# EAGLE board sensor_v5 (EAGLE 7.6.0)
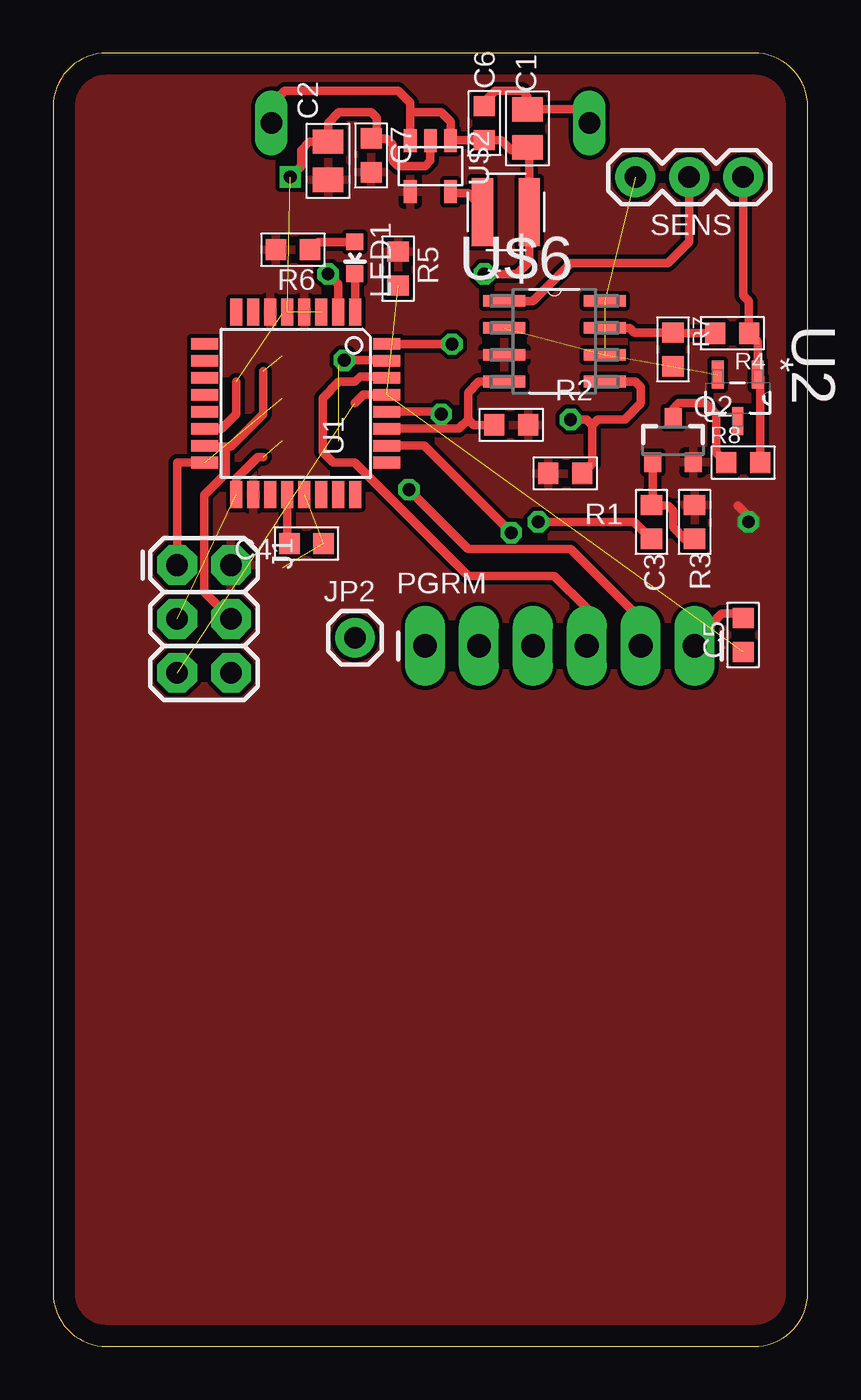
[diagram p0: board, top side]
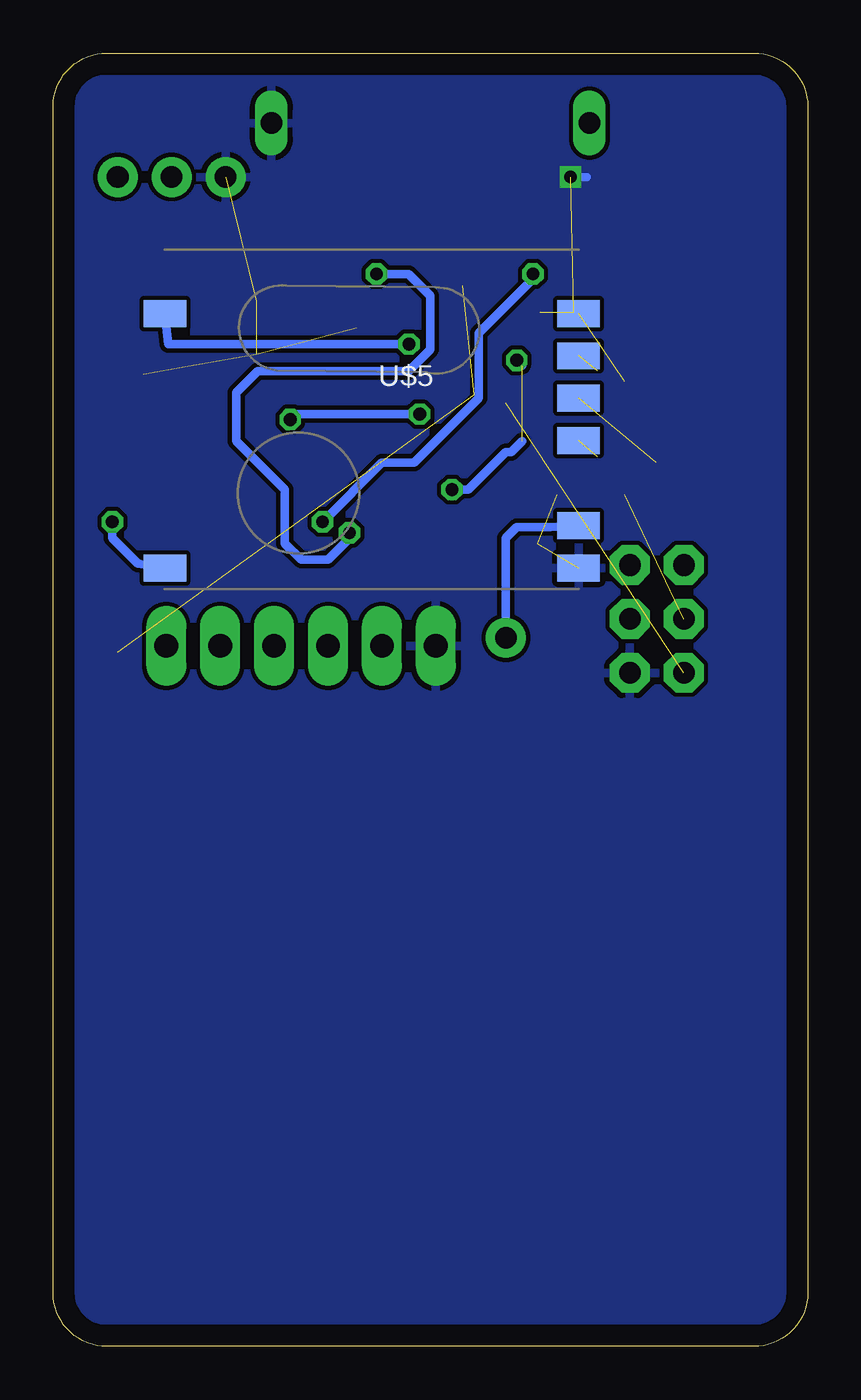
[diagram p1: board, bottom side, seen from below]

Size 35.56 x 60.96 mm. Coordinates in mm from the lower left corner, seen from the top.
Outline: 0,58.42 0,2.54 arc90 2.54,0 33.02,0 arc90 35.56,2.54 35.56,58.42 arc90 33.02,60.96 2.54,60.96 arc90 0,58.42
Copper layers (1*16): Top 0.035mm / dielectric 1.5mm / Bottom 0.035mm
Design rules "default": minimum track width 10mil, minimum drill 24mil, track to track 8mil, track to pad 8mil, pad to pad 8mil, via to via 8mil, smd to smd 8mil, copper to edge 40mil, drill to drill 8mil, minimum pad ring 10mil, minimum via ring 8mil, stop-mask expansion 4mil, vias tented up to drill 0mil, thermal gap 10mil

## Footprints (pad centres in the part's own frame; a part is rotated, then mirrored left to right if it is on the bottom)
C0805-N = smd 1.15 x 1.45: 1 -0.9,0; 2 0.9,0
C0603-N = smd 0.95 x 1: 1 -0.8,0; 2 0.8,0
2X3 = drill 1.016 pad 1.88 octagon: 1 0,0; 2 0,2.54; 3 2.54,0; 4 2.54,2.54; 5 5.08,0; 6 5.08,2.54
1X01 = drill 1.016 pad 1.88: 1 0,0
LED-0603 = smd 0.8 x 0.8: A 0,-0.75; C 0,0.75
1X06_LONGPADS = drill 1.118 pad 1.88 long: 1 0,0; 2 2.54,0; 3 5.08,0; 4 7.62,0; 5 10.16,0; 6 12.7,0
SOT23-3 = smd 0.8 x 0.9: 1 -0.95,-1; 2 0.95,-1; 3 0,1.1
R0603-N = smd 0.95 x 1: 1 -0.8,0; 2 0.8,0
1X03 = drill 1.016 pad 1.88: 1 0,0; 2 2.54,0; 3 5.08,0
TQFP32-08 = smd 1.27 x 0.559: 1 -4.293,2.8; 2 -4.293,2; 3 -4.293,1.2; 4 -4.293,0.4; 5 -4.293,-0.4; 6 -4.293,-1.2; 7 -4.293,-2; 8 -4.293,-2.8; 17 4.293,-2.8; 18 4.293,-2; 19 4.293,-1.2; 20 4.293,-0.4; 21 4.293,0.4; 22 4.293,1.2; 23 4.293,2; 24 4.293,2.8 | smd 0.559 x 1.27: 9 -2.8,-4.293; 10 -2,-4.293; 11 -1.2,-4.293; 12 -0.4,-4.293; 13 0.4,-4.293; 14 1.2,-4.293; 15 2,-4.293; 16 2.8,-4.293; 25 2.8,4.293; 26 2,4.293; 27 1.2,4.293; 28 0.4,4.293; 29 -0.4,4.293; 30 -1.2,4.293; 31 -2,4.293; 32 -2.8,4.293
SOT95P237X112-3N = smd 1.321 x 0.559: 1 -1.092,0.94; 2 -1.092,-0.94 | smd 1.321 x 0.508: 3 1.092,0
KEYSTONEAAHOLDER_2CELL = drill 1.016 pad 1.524 long: P$1 -7.493,27.178; P$2 7.493,27.178
SOT23-5 = smd 0.6 x 1.1: P$1 -0.95,-1.2; P$2 0,-1.2; P$3 0.95,-1.2; P$4 0.95,1.2; P$5 -0.95,1.2
WURTH_10UH_650MA = smd 3.2 x 1: P$1 0,-1.1; P$2 0,1.1
RFM69W-MINPADS = smd 2 x 1.27: ANA 8,-5; DIO0 -11.5,5; GND 8,-7; MISO 8,1; MOSI 8,3; NSS 8,5; SCK 8,-1; VDD -11.5,-7
SOIC127P600X175-8N = smd 1.981 x 0.559: 1 -2.362,1.905; 2 -2.362,0.635; 3 -2.362,-0.635; 4 -2.362,-1.905; 5 2.362,-1.905; 6 2.362,-0.635; 7 2.362,0.635; 8 2.362,1.905

## Placement (x,y rotation side)
C1  10uF  [C0805-N]  22.35,57.4 90 top
C2  10uF  [C0805-N]  12.95,55.88 90 top
C3  0.1uF  [C0603-N]  28.19,38.86 270 top
C4  0.1uF  [C0603-N]  11.94,37.85 180 top
C5  0.1uF  [C0603-N]  32.51,33.53 90 top
C6  0.1uF  [C0603-N]  20.32,57.66 90 top
C7  0.1uF  [C0603-N]  14.99,56.13 90 top
J1  AVR_SPI_PRG_6PTH  [2X3]  5.84,36.83 270 top
JP2  M01PTH  [1X01]  14.22,33.4 0 top
LED1  [LED-0603]  14.22,51.31 180 top
PGRM  [1X06_LONGPADS]  17.53,33.02 0 top
Q2  MOSFET-P  [SOT23-3]  29.21,42.67 0 top
R1  10k  [R0603-N]  24.13,41.15 180 top
R2  10k  [R0603-N]  21.59,43.43 0 top
R3  1M  [R0603-N]  30.23,38.86 90 top
R4  10k  [R0603-N]  32,47.75 180 top
R5  10k  [R0603-N]  16.26,50.8 90 top
R6  480  [R0603-N]  11.3,51.69 0 top
R7  THERM  [R0603-N]  29.21,46.99 270 top
R8  330  [R0603-N]  32.51,41.66 0 top
SENS  [1X03]  27.43,55.12 0 top
U1  ATMEGA328P  [TQFP32-08]  11.43,44.45 270 top
U2  LM4040A20IDBZT  [SOT95P237X112-3N]  32.26,44.7 270 top
U$1  KEYSTONEAAHOLDER_2CELL  [KEYSTONEAAHOLDER_2CELL]  17.78,30.48 0 top
U$2  TPS61097-33  [SOT23-5]  17.78,55.63 180 top
U$4  4.7uH  [WURTH_10UH_650MA]  21.34,53.47 270 top
U$5  RFM69  [RFM69W-MINPADS]  18.8,43.69 0 bottom
U$6  MCP3426A0-E/SN  [SOIC127P600X175-8N]  23.62,47.37 0 top

## Library data of the parts
C1-C7 R1-R8 = passives-7351
J1 JP2 PGRM SENS = SparkFun-Connectors
LED1 = SparkFun-LED
Q2 = SparkFun-DiscreteSemi; PROD_ID: TRANS-11153
U1 = SparkFun-DigitalIC; PROD_ID: IC-09069
U2 = Texas Instruments_By_element14_Batch_1; MPN: LM4040A20IDBZT; OC_FARNELL: 1702826; OC_NEWARK: 53K9321; PACKAGE: 3-SOT-23; SUPPLIER: TEXAS INSTRUMENTS
U$1 U$2 U$4 = _my-parts
U$5 = LowPowerLab
U$6 = Microchip_By_element14_Batch_1; MPN: MCP3426A0-E/SN; OC_FARNELL: 1825012; OC_NEWARK: 52R9954; PACKAGE: SOIC-8; SUPPLIER: Microchip

## Nets
G: C3.1 Q2.1 R3.1
GND: C1.2 C2.2 C4.1 C6.2 C7.2 J1.6 PGRM.1 R7.2 SENS.1 U1.3 U1.5 U1.21 U2.2 U$1.P$2 U$2.P$2 U$5.GND U$6.2 U$6.6 U$6.8
IRQ: U1.32 U$5.DIO0
MISO: J1.1 U1.16 U$5.MISO
MOSI: J1.4 U1.15 U$5.MOSI
N$1: U$2.P$5 U$4.P$1
N$4: C4.2 U1.20
N$5: LED1.C U1.1
N$7: JP2.1 U$5.ANA
N$9: LED1.A R6.2
N$10: C5.2 PGRM.6
RST: C5.1 J1.5 R5.1 U1.29
RX: PGRM.4 U1.30
S_EN: Q2.3 R8.1
SCK: J1.3 U1.17 U$5.SCK
SCL: R1.1 U1.28 U$6.5
SDA: R2.1 U1.27 U$6.4
SENS: SENS.2 U$6.1
SENS_EN: C3.2 U1.2
SS: U1.14 U$5.NSS
THERM: R4.2 R7.1 U$6.7
TX: PGRM.5 U1.31
V3.3: C2.1 C7.1 J1.2 Q2.2 R1.2 R2.2 R3.2 R5.2 R6.1 U1.4 U1.6 U1.18 U$2.P$4 U$5.VDD U$6.3
V_REF: R4.1 R8.2 SENS.3 U2.1
VBAT: C1.1 C6.1 U1.26 U$1.P$1 U$2.P$1 U$2.P$3 U$4.P$2

## Tracks (layer width: path | path; a pad name or v marks a point on that pad's centre or on a via)
G
  Top 0.406: Q2.1 28.26,39.73 C3.1 28.23,39.62 28.96,39.62 29.21,39.37 29.21,38.61 29.76,38.06 R3.1
GND  (via drill 0.6)  (9 unrouted)
  Top 0.406: U$2.P$2 17.78,55.88 17.53,55.63 16.26,55.63 16,55.88 16,56.64 15.71,56.93 C7.2 15.24,57.19 15.24,57.91 14.99,58.17 13.46,58.17 12.95,57.66 C2.2 12.08,56.78 11.68,56.39 11.68,55.63 v11.18,55.12 | C6.2 20.32,58.67 20.83,59.18 22.1,59.18 22.35,58.93 C1.2 24.63,58.3 U$1.P$2
  Bottom 0.406: v11.18,55.12 10.41,55.12
  pour Bottom: -1.02,-1.27 36.83,-1.27 36.83,62.23 -1.27,62.23 -1.27,-1.27
IRQ  (via drill 0.6)
  Top 0.406: U1.32 17.27,47.25 v18.8,47.24
  Bottom 0.406: v18.8,47.24 30.12,47.24 U$5.DIO0
MISO  (1 unrouted)
  Top 0.406: U1.16 5.85,41.65 5.84,41.66 J1.1
MOSI  (1 unrouted)
  Top 0.406: 9.91,45.97 9.91,43.94 8.38,42.42 8.13,42.42 | 8.13,42.42 7.17,42.42 U1.15 | 8.13,42.42 8.13,41.15 7.11,40.13 7.11,35.56 J1.4
N$1
  Top 0.406: U$4.P$1 20.24,53.68 19.56,54.36 18.8,54.36 U$2.P$5
N$4
  Top 0.406: U1.20 11.03,37.95 C4.2
N$5
  Top 0.406: U1.1 LED1.C
N$7
  Bottom 0.406: JP2.1 14.22,38.1 13.72,38.61 12.15,38.61 U$5.ANA
N$9
  Top 0.406: LED1.A 12.47,52.06 R6.2
N$10
  Top 0.406: PGRM.6 30.23,33.27 31.5,34.54 32.3,34.54 C5.2
RST  (3 unrouted)
  Top 0.406: U1.29 14.62,44.85 14.22,44.45
RX
  Top 0.406: PGRM.4 25.15,34.8 23.62,36.32 19.56,36.32 14.22,41.66 13.21,41.66 12.7,42.16 12.7,44.7 13.46,45.47 14.22,45.47 14.48,45.72 15.65,45.72 U1.30
S_EN
  Top 0.406: Q2.3 29.21,44.2 29.46,44.45 30.73,44.45 31.24,43.94 31.24,42.13 R8.1
SCK  (2 unrouted)
  Top 0.406: 9.91,41.91 9.65,41.91 8.64,40.89 U1.17
SCL  (via drill 0.6)
  Top 0.406: U$6.5 27.43,45.47 27.69,45.21 27.69,44.45 26.92,43.69 25.65,43.69 25.4,43.43 | 25.4,43.43 25.4,41.62 R1.1 | U1.28 18.18,44.05 v18.29,43.94 | v24.38,43.69 25.15,43.69 25.4,43.43
  Bottom 0.406: v18.29,43.94 24.13,43.94 v24.38,43.69
SDA
  Top 0.406: U$6.4 20.07,45.47 19.56,44.96 19.56,43.69 | 19.56,43.69 19.81,43.43 R2.1 | U1.27 19.12,43.25 19.56,43.69
SENS
  Top 0.406: U$6.1 22.61,49.28 24.38,51.05 28.96,51.05 29.97,52.07 SENS.2
SENS_EN  (via drill 0.6)
  Top 0.406: U1.2 13.43,50.07 v12.95,50.55 | v22.86,38.86 27.39,38.86 C3.2
  Bottom 0.406: v12.95,50.55 12.95,50.29 15.49,47.75 15.49,44.7 18.54,41.66 20.07,41.66 v22.86,38.86
SS  (1 unrouted)
  Top 0.406: U1.14 7.94,43.25 8.64,43.94 8.64,45.47
THERM
  Top 0.406: R4.2 29.25,47.75 R7.1 27.39,47.79 27.18,48.01 U$6.7
TX  (via drill 0.6)  (1 unrouted)
  Top 0.406: PGRM.5 27.69,34.29 24.38,37.59 19.56,37.59 v16.76,40.39 | v13.72,46.48 15.69,46.48 U1.31
  Bottom 0.406: v16.76,40.39 16,40.39 14.22,42.16 13.97,42.16 13.46,42.67 | 13.46,46.23 v13.72,46.48
V3.3  (via drill 0.6)
  Top 0.406: v32.77,38.86 32.77,39.12 32.26,39.62
  Bottom 0.406: U$5.VDD 31.57,36.9 32.77,38.1 v32.77,38.86
  pour Top: -1.27,-1.27 36.83,-1.27 36.83,62.23 -1.27,62.23
V_REF
  Top 0.406: R8.2 33.31,45.68 U2.1 33.2,47.36 R4.1 32.77,47.79 32.77,49.28 32.51,49.53 SENS.3
VBAT  (via drill 0.6)
  Top 0.406: U$2.P$3 16.83,58.17 | 16.83,58.17 16.83,58.61 16.26,59.18 10.92,59.18 10.41,58.67 10.41,57.78 U$1.P$1 | 16.83,58.17 18.29,58.17 18.73,57.72 U$2.P$1 18.76,56.86 C6.1 21.12,56.86 21.59,56.39 22.24,56.39 C1.1 22.44,56.42 U$4.P$2 22.44,51.14 21.84,50.55 v20.32,50.55 | U1.26 17.49,42.45 v21.59,38.35
  Bottom 0.406: v21.59,38.35 21.59,38.1 22.61,37.08 23.88,37.08 24.64,37.85 24.64,40.39 26.92,42.67 26.92,44.96 25.91,45.97 18.8,45.97 17.78,46.99 17.78,49.53 18.8,50.55 v20.32,50.55